# EAGLE board Telemetry Unit (EAGLE 9.3.0)
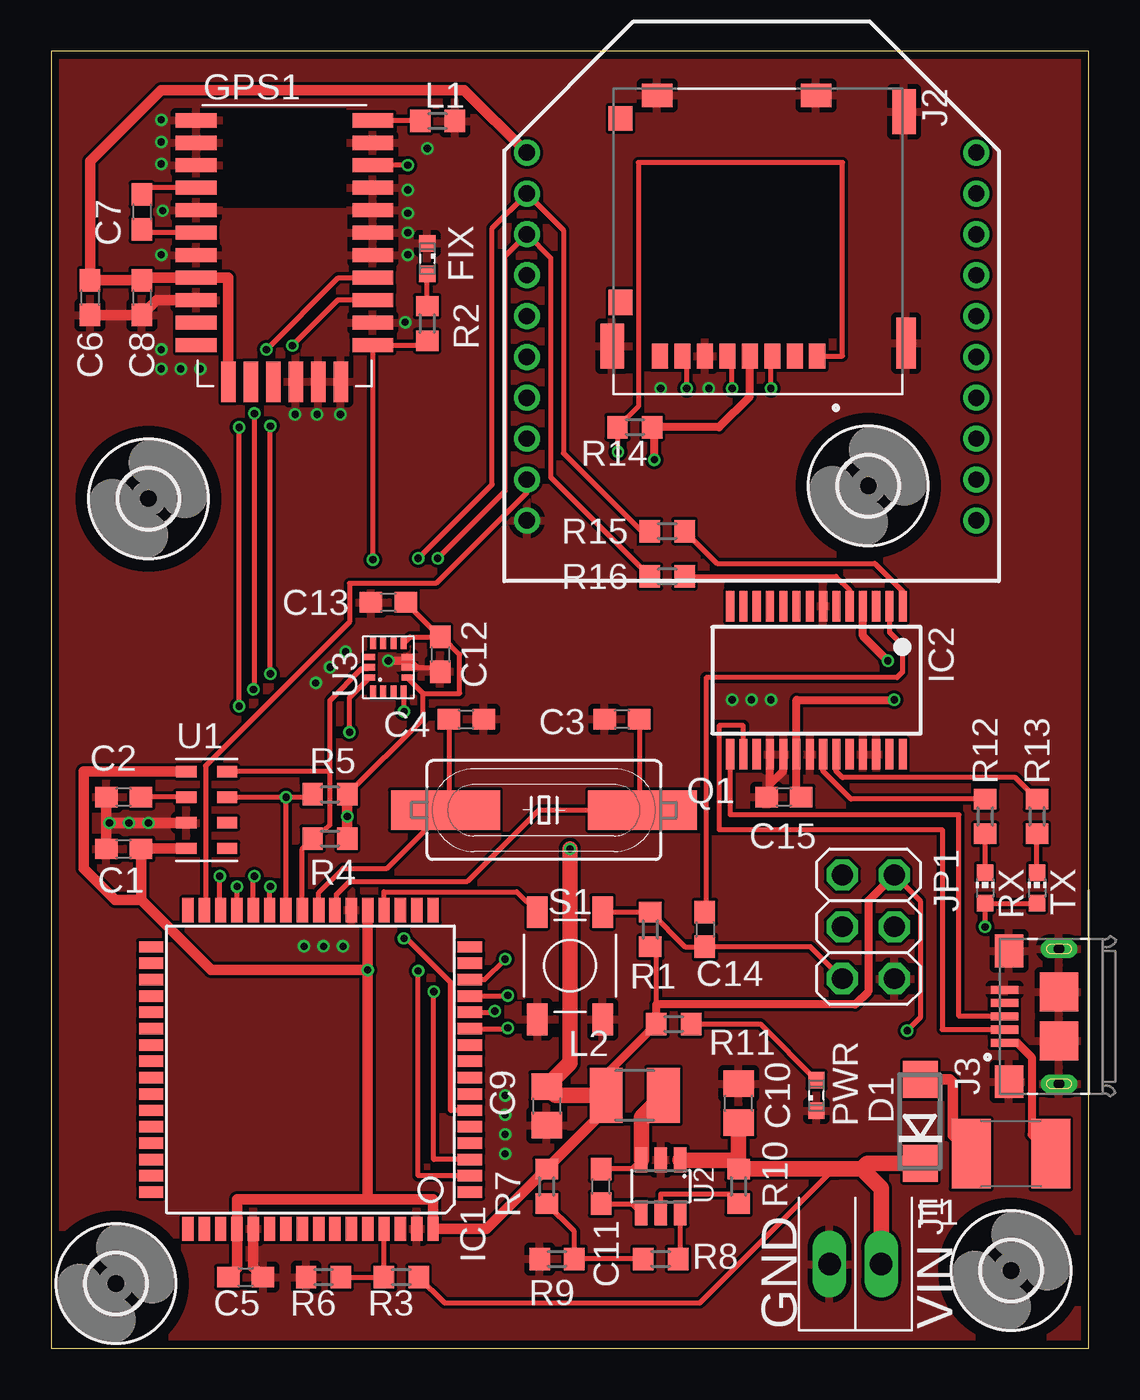
[diagram p0: board, top side]
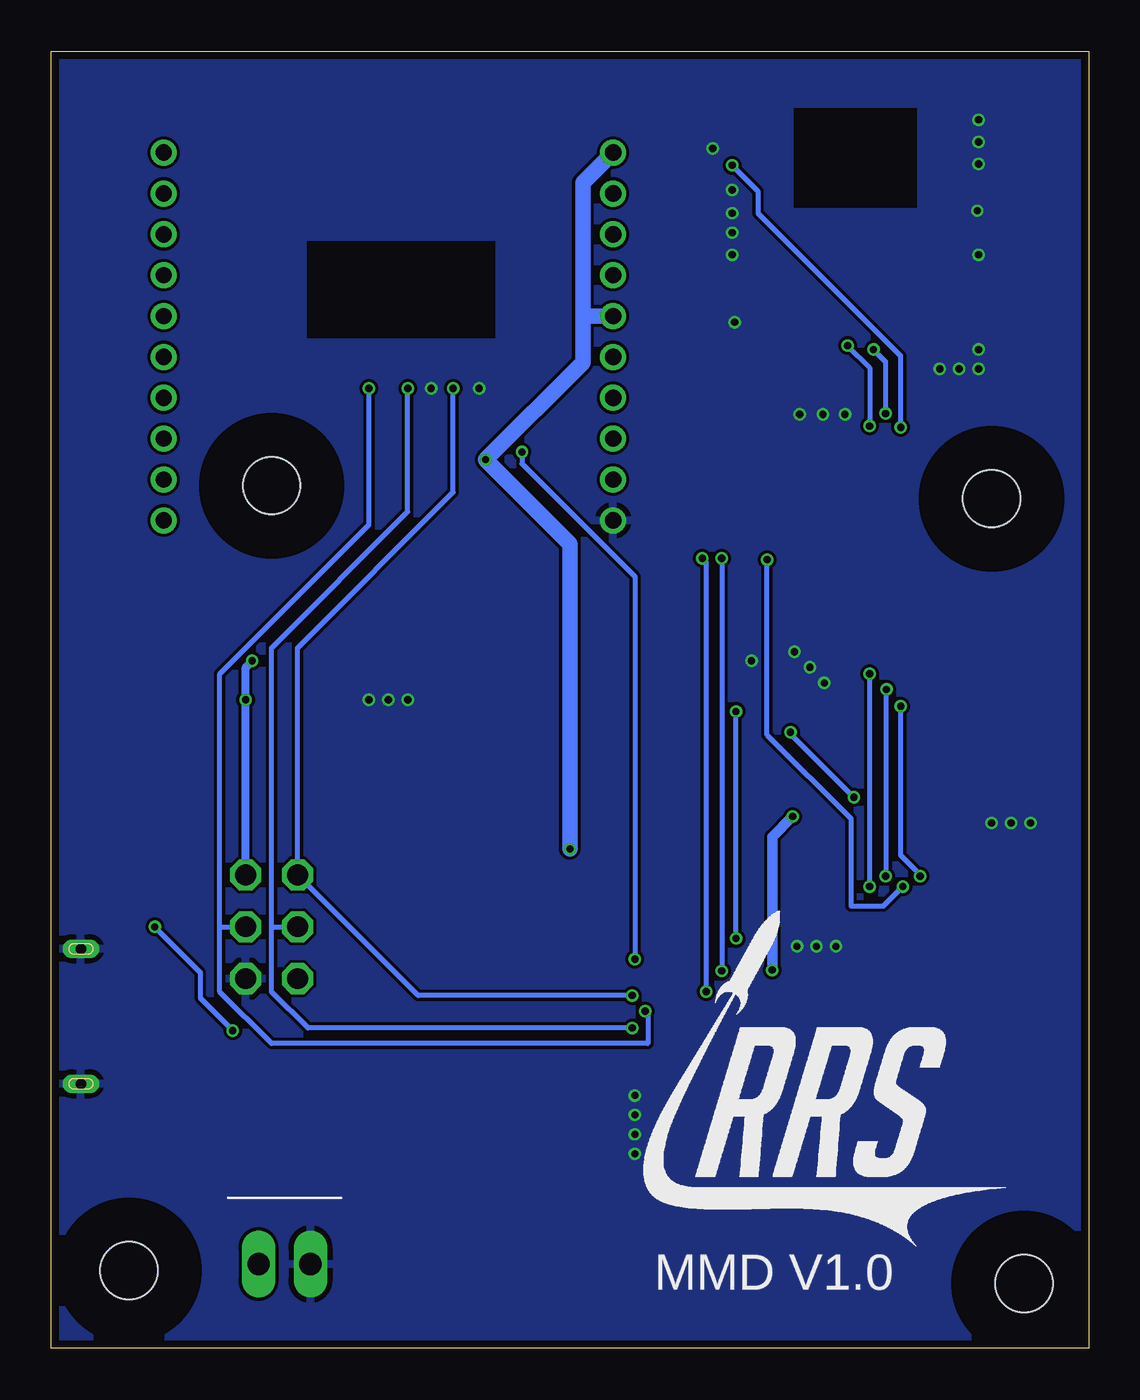
[diagram p1: board, bottom side, seen from below]

Size 50.8 x 63.5 mm. Coordinates in mm from the lower left corner, seen from the top.
Outline: 0,0 50.8,0 50.8,63.5 0,63.5 0,0
Copper layers (1*16): Top 0.035559375mm / dielectric 1.6mm / Bottom 0.035559375mm
Design rules "oshpark-2layer": minimum track width 6mil, minimum drill 10mil, track to track 6mil, track to pad 6mil, pad to pad 6mil, via to via 6mil, smd to smd 6mil, copper to edge 15mil, drill to drill 6mil, minimum pad ring 5mil, minimum via ring 5mil, stop-mask expansion 2.5mil, vias tented up to drill 0mil, thermal gap 10mil

## Footprints (pad centres in the part's own frame; a part is rotated, then mirrored left to right if it is on the bottom)
C0603 = smd 1.1 x 1: 1 -0.85,0; 2 0.85,0
C0805 = smd 1.3 x 1.5: 1 -0.95,0; 2 0.95,0
DO214AC = smd 1.8 x 1.7: A 2.05,0; C -2.05,0
FUSM1812X02 = smd 1.9 x 3.4: 1 -1.95,0; 2 1.95,0
SML0603 = smd 0.8 x 0.8: A 0.75,0; C -0.75,0
M20048-1 = smd 2 x 0.7: 1 -4.32,5.5; 2 -4.32,4.4; 3 -4.32,3.3; 4 -4.32,2.2; 5 -4.32,1.1; 6 -4.32,0; 7 -4.32,-1.1; 8 -4.32,-2.2; 9 -4.32,-3.3; 10 -4.32,-4.4; 11 -4.32,-5.5; 18 4.32,-5.5; 19 4.32,-4.4; 20 4.32,-3.3; 21 4.32,-2.2; 22 4.32,-1.1; 23 4.32,0; 24 4.32,1.1; 25 4.32,2.2; 26 4.32,3.3; 27 4.32,4.4; 28 4.32,5.5 | smd 0.7 x 2: 12 -2.75,-7.3; 13 -1.65,-7.3; 14 -0.55,-7.3; 15 0.55,-7.3; 16 1.65,-7.3; 17 2.75,-7.3
TQFP64 = smd 1.194 x 0.559: 1 -7.8,6; 2 -7.8,5.2; 3 -7.8,4.4; 4 -7.8,3.6; 5 -7.8,2.8; 6 -7.8,2; 7 -7.8,1.2; 8 -7.8,0.4; 9 -7.8,-0.4; 10 -7.8,-1.2; 11 -7.8,-2; 12 -7.8,-2.8; 13 -7.8,-3.6; 14 -7.8,-4.4; 15 -7.8,-5.2; 16 -7.8,-6; 33 7.8,-6; 34 7.8,-5.2; 35 7.8,-4.4; 36 7.8,-3.6; 37 7.8,-2.8; 38 7.8,-2; 39 7.8,-1.2; 40 7.8,-0.4; 41 7.8,0.4; 42 7.8,1.2; 43 7.8,2; 44 7.8,2.8; 45 7.8,3.6; 46 7.8,4.4; 47 7.8,5.2; 48 7.8,6 | smd 0.559 x 1.194: 17 -6,-7.8; 18 -5.2,-7.8; 19 -4.4,-7.8; 20 -3.6,-7.8; 21 -2.8,-7.8; 22 -2,-7.8; 23 -1.2,-7.8; 24 -0.4,-7.8; 25 0.4,-7.8; 26 1.2,-7.8; 27 2,-7.8; 28 2.8,-7.8; 29 3.6,-7.8; 30 4.4,-7.8; 31 5.2,-7.8; 32 6,-7.8; 49 6,7.8; 50 5.2,7.8; 51 4.4,7.8; 52 3.6,7.8; 53 2.8,7.8; 54 2,7.8; 55 1.2,7.8; 56 0.4,7.8; 57 -0.4,7.8; 58 -1.2,7.8; 59 -2,7.8; 60 -2.8,7.8; 61 -3.6,7.8; 62 -4.4,7.8; 63 -5.2,7.8; 64 -6,7.8
SSOP28 = smd 0.4 x 1.5: 1 -4.225,-3.625; 2 -3.575,-3.625; 3 -2.925,-3.625; 4 -2.275,-3.625; 5 -1.625,-3.625; 6 -0.975,-3.625; 7 -0.325,-3.625; 8 0.325,-3.625; 9 0.975,-3.625; 10 1.625,-3.625; 11 2.275,-3.625; 12 2.925,-3.625; 13 3.575,-3.625; 14 4.225,-3.625; 15 4.225,3.625; 16 3.575,3.625; 17 2.925,3.625; 18 2.275,3.625; 19 1.625,3.625; 20 0.975,3.625; 21 0.325,3.625; 22 -0.325,3.625; 23 -0.975,3.625; 24 -1.625,3.625; 25 -2.275,3.625; 26 -2.925,3.625; 27 -3.575,3.625; 28 -4.225,3.625
ST_2X1 = drill 1.1 long: 1 0,1.27; 2 0,-1.27
MOLEX_503182-1852 = smd 0.8 x 1.24: 1 -2.9,6.355; 2 -1.8,6.355; 3 -0.7,6.355; 4 0.4,6.355; 5 1.5,6.355; 6 2.6,6.355; 7 3.7,6.355; 8 4.8,6.355 | smd 1.16 x 1.2: DT 6.74,-5.275 | smd 0.95 x 2.5: P1 -7.245,5.725 | smd 1.15 x 2.2: P2 7.145,5.875; P3 -7.145,-5.605 | smd 1.5 x 1.15: P4 -2.84,-6.4; P5 4.94,-6.4 | smd 1.16 x 1.25: SW 6.74,3.725
FCI_10118193-0001LF = smd 0.4 x 1.35: 1 -1.3,2.675; 2 -0.65,2.675; 3 0,2.675; 4 0.65,2.675; 5 1.3,2.675 | smd 1.6 x 1.4: S1 -3.2,2.45; S2 3.2,2.45 | smd 1.9 x 1.9: S3 1.2,0; S4 -1.2,0 | drill 0.5 pad 0.9 long: S5 -3.3,0; S6 3.3,0
2X03 = drill 1.016 octagon: 1 -2.54,-1.27; 2 -2.54,1.27; 3 0,-1.27; 4 0,1.27; 5 2.54,-1.27; 6 2.54,1.27
L0603 = smd 1 x 1.1: 1 -0.85,0; 2 0.85,0
L1210 = smd 1.6 x 2.7: 1 -1.4,0; 2 1.4,0
HC49UP = smd 5.334 x 1.93: 1 -4.826,0; 2 4.826,0
R0603 = smd 1 x 1.1: 1 -0.85,0; 2 0.85,0
CHIP-LED0603 = smd 0.8 x 0.8: A 0,-0.75; C 0,0.75
TACT_SW_4.5MM = smd 1.55 x 1: P$1 -2.625,1.6; P$2 -2.625,-1.6; P$3 2.625,1.6; P$4 2.625,-1.6
LGA8 = smd 1 x 0.55: 1 -1,1.875; 2 -1,0.625; 3 -1,-0.625; 4 -1,-1.875; 5 1,-1.875; 6 1,-0.625; 7 1,0.625; 8 1,1.875
TSOT23-6 = smd 0.62 x 1.22: 1 -0.95,-1.3; 2 0,-1.3; 3 0.95,-1.3; 4 0.95,1.3; 5 0,1.3; 6 -0.95,1.3
14-LGA = smd 0.55 x 0.3: 1 -1.175,0.75; 2 -1.175,0.25; 3 -1.175,-0.25; 4 -1.175,-0.75; 8 1.175,-0.75; 9 1.175,-0.25; 10 1.175,0.25; 11 1.175,0.75 | smd 0.3 x 0.55: 5 -0.5,-0.925; 6 0,-0.925; 7 0.5,-0.925; 12 0.5,0.925; 13 0,0.925; 14 -0.5,0.925
2,8 = hole 2.8: 0,0
XBEE = drill 0.8 pad 1.27: 1 -11,9; 2 -11,7; 3 -11,5; 4 -11,3; 5 -11,1; 6 -11,-1; 7 -11,-3; 8 -11,-5; 9 -11,-7; 10 -11,-9; 11 11,-9; 12 11,-7; 13 11,-5; 14 11,-3; 15 11,-1; 16 11,1; 17 11,3; 18 11,5; 19 11,7; 20 11,9

## Placement (x,y rotation side)
C1  2.2u  [C0603]  3.56,24.45 180 top
C2  100n  [C0603]  3.56,26.99 180 top
C3  22p  [C0603]  27.94,30.8 180 top
C4  22p  [C0603]  20.32,30.8 0 top
C5  2.2u  [C0603]  9.53,3.49 0 top
C6  2.2u  [C0603]  1.91,51.44 270 top
C7  22p  [C0603]  4.45,55.63 270 top
C8  22p  [C0603]  4.45,51.44 270 top
C9  22u  [C0805]  24.26,11.87 270 top
C10  22u  [C0805]  33.66,12 90 top
C11  22p  [C0603]  26.92,7.94 90 top
C12  100n  [C0603]  19.05,33.97 270 top
C13  2.2u  [C0603]  16.51,36.51 180 top
C14  100n  [C0603]  32,20.51 270 top
C15  2.2u  [C0603]  35.88,26.99 180 top
D1  [DO214AC]  42.55,11.11 90 top
F1  MF-MSMF050-2  [FUSM1812X02]  46.99,9.53 180 top
FIX  [SML0603]  18.41,53.34 270 top
GPS1  M20048-1  [M20048-1]  11.43,54.61 0 top
IC1  MEGA128-A  [TQFP64]  12.7,13.65 180 top
IC2  FT232RL  [SSOP28]  37.47,32.7 180 top
J1  [ST_2X1]  39.37,4.13 270 top
J2  503182-1852  [MOLEX_503182-1852]  34.61,54.93 180 top
J3  10118193-0001LF  [FCI_10118193-0001LF]  49.34,16.26 90 top
JP1  [2X03]  40.01,20.64 270 top
L1  1.8n  [L0603]  18.92,60.07 0 top
L2  6.8u  [L1210]  28.57,12.38 180 top
PWR  [SML0603]  37.47,12.38 90 top
Q1  10MHz  [HC49UP]  24.13,26.35 0 top
R1  10k  [R0603]  29.34,20.51 90 top
R2  470  [R0603]  18.41,50.16 90 top
R3  30k  [R0603]  17.14,3.49 180 top
R4  1.8k  [R0603]  13.65,27.11 180 top
R5  1.8k  [R0603]  13.65,24.96 180 top
R6  10k  [R0603]  13.34,3.49 180 top
R7  40.2k  [R0603]  24.26,7.94 270 top
R8  59k  [R0603]  29.84,4.38 180 top
R9  13k  [R0603]  24.77,4.38 180 top
R10  100k  [R0603]  33.66,7.94 270 top
R11  470  [R0603]  30.48,15.88 0 top
R12  1k  [R0603]  45.72,26.04 90 top
R13  1k  [R0603]  48.26,26.04 90 top
R14  10k  [R0603]  28.57,45.09 180 top
R15  10k  [R0603]  30.16,40.01 180 top
R16  10k  [R0603]  30.16,37.78 180 top
RX  [CHIP-LED0603]  45.72,22.54 0 top
S1  TACT_SW_4.5MM  [TACT_SW_4.5MM]  25.4,18.73 90 top
TX  [CHIP-LED0603]  48.26,22.54 0 top
U1  MPL3115A2  [LGA8]  7.62,26.35 0 top
U2  AP65111A  [TSOT23-6]  29.84,7.94 180 top
U3  LSM6DS3  [14-LGA]  16.51,33.34 90 top
U$1  [2,8]  4.76,41.59 0 top
U$2  [2,8]  46.99,3.81 0 top
U$3  [2,8]  40.01,42.23 0 top
U$4  [2,8]  3.17,3.17 0 top
XB1  XBEE  [XBEE]  34.29,49.53 0 top

## Library data of the parts
C1-C15 R1-R11 R14-R16 = resistor
D1 = diode
F1 = MF-MSMF050-2; AVAILABILITY: Unavailable; DESCRIPTION: PTC Resettable Fuse 0.5A_hold_ 1A_trip_ 15V 100A 0.8W 0.15s 0.15Ohm SMD Solder Pad 1812 T/R; MF: Bourns; MP: MF-MSMF050-2; PACKAGE: 1812 Bourns; PRICE: None
FIX PWR RX TX = led
GPS1 J1 L1 L2 S1 U1-U3 = TrackerPeripherals
IC1 = atmel; MPN: ATMEGA128-16AU; OC_FARNELL: 9171118; OC_NEWARK: 95K7364
IC2 = ftdichip; MPN: FT232RL; OC_FARNELL: 1146032; OC_NEWARK: 91K9918
J2 = 503182-1852_SD; DESCRIPTION: MICRO SD NORMAL ULTRALOWPRO8CKTE; DIGI-KEY_PART_NUMBER: WM12834CT-ND; DIGI-KEY_PURCHASE_URL: https://www.digikey.com/product-detail/en/molex/5031821852/WM12834CT-ND/5823232?utm_source=snapeda&utm_medium=aggregator&utm_campaign=symbol; MF: Molex, LLC; MP: 5031821852; PACKAGE: None
J3 = 10118193-0001LF_microUSB; DESCRIPTION: Conn Micro USB Type B RCP 5 POS 0.65mm Solder RA SMD 5 Terminal 1 Port T/R; DIGI-KEY_PART_NUMBER: 609-4616-1-ND; DIGI-KEY_PURCHASE_URL: https://www.digikey.com/product-detail/en/amphenol-icc-fci/10118193-0001LF/609-4616-1-ND/2785380?utm_source=snapeda&utm_medium=aggregator&utm_campaign=symbol; MF: Amphenol ICC; MP: 10118193-0001LF; PACKAGE: None
JP1 = pinhead
Q1 = crystal; OC_FARNELL: unknown; OC_NEWARK: unknown
R12 R13 = rcl; SPICEPREFIX: R
U$1-U$4 = holes
XB1 = TrackerPeripherals; MPN: XBP24-Z7UIT-004; OC_FARNELL: 1751799; OC_NEWARK: 34R5507

## Nets
!GPS_SLP: GPS1.26 IC1.30
!RST: IC1.20 S1.P$3
+3V3: C1.1 C5.1 C6.1 C8.1 C9.1 C12.1 C13.1 C15.1 GPS1.8 GPS1.12 IC1.21 IC1.52 IC1.64 IC2.4 IC2.20 J2.4 JP1.2 L2.2 R1.1 R4.1 R5.1 R7.1 R11.1 R14.1 RX.A TX.A U1.1 U1.4 U3.5 U3.8 XB1.1 XB1.5
ACCEL_INT: IC1.6 U3.4
CS_SD: IC1.14 J2.1 R14.2
FIX: GPS1.18 IC1.29 R2.1
GND: C1.2 C2.2 C3.2 C4.2 C5.2 C6.2 C8.2 C9.2 C10.2 C12.2 C13.2 C15.2 FIX.C GPS1.1 GPS1.2 GPS1.3 GPS1.5 GPS1.7 GPS1.9 GPS1.15 GPS1.16 GPS1.17 GPS1.19 GPS1.22 GPS1.23 GPS1.24 GPS1.25 GPS1.27 IC1.22 IC1.53 IC1.63 IC2.7 IC2.18 IC2.19 IC2.21 IC2.25 IC2.26 J1.2 J2.6 J2.P1 J2.P2 J2.P3 J2.P4 J2.P5 J3.5 J3.S1 J3.S2 J3.S3 J3.S4 J3.S5 J3.S6 JP1.6 L1.2 PWR.C R6.2 R9.2 S1.P$1 S1.P$2 U1.3 U2.2 U3.6 U3.7 XB1.10
MISO: IC1.13 J2.7 JP1.1
MOSI: IC1.12 J2.3 JP1.4
N$1: C7.1 GPS1.4
N$2: C2.1 U1.2
N$3: C7.2 GPS1.6
N$4: GPS1.28 L1.1
N$5: IC1.61 R3.2 R6.1
N$6: FIX.A R2.2
N$7: C11.2 L2.1 U2.3
N$8: R7.2 R8.2 R9.1
N$9: R10.2 U2.5
N$10: R8.1 U2.6
N$11: IC2.16 J3.2
N$12: C11.1 U2.4
N$13: IC2.15 J3.3
N$14: PWR.A R11.2
N$15: R12.1 RX.C
N$16: C14.1 IC2.2
N$17: R13.1 TX.C
N$18: IC2.22 R12.2
N$19: IC2.23 R13.2
N$20: IC2.1 R15.1
N$21: IC2.5 R16.1
N$22: F1.1 J3.1
RF_SLP: IC1.31 XB1.9
RST2: C14.2 JP1.5 R1.2 S1.P$4
RX0: IC1.2 R15.2 XB1.2
RX1: GPS1.20 IC1.27
SCK: IC1.11 J2.5 JP1.3
SCL: IC1.25 R5.2 U1.8 U3.13
SDA: IC1.26 R4.2 U1.7 U3.14
TX0: IC1.3 R16.2 XB1.3
TX1: GPS1.21 IC1.28
V_USB: D1.A F1.2
VBAT: C10.1 D1.C J1.1 R3.1 R10.1 U2.1
XTAL1: C4.1 IC1.24 Q1.1
XTAL2: C3.1 IC1.23 Q1.2

## Tracks (layer width: path | path; a pad name or v marks a point on that pad's centre or on a via)
!GPS_SLP  (via drill 0.35)
  Top 0.254: IC1.30 8.26,21.45 v8.26,23.11 | v9.21,31.43 v9.21,45.09 | v17.46,57.91 GPS1.26
  Bottom 0.254: v8.26,23.11 8.26,23.18 9.21,24.13 v9.21,31.43 | v9.21,45.09 9.21,48.58 16.19,55.56 16.19,56.64 v17.46,57.91
!RST
  Top 0.254: IC1.20 16.3,22.35 22.8,22.35 S1.P$3
+3V3  (via drill 0.35)
  Top 0.254: 27.18,11.71 L2.2 27.18,13.42 | U3.8 17.57,34.82 C12.1 | C13.1 C12.1 | 4.44,24.48 C1.1 | U3.5 18.2,32.07 | 18.2,32.07 20,32.07 20,33.97 19.15,34.82 C12.1 | R4.1 18.2,30.82 18.2,32.07 | 29.63,16.83 29.63,19.37 R1.1 | JP1.2 42.55,21.91 42.55,16.19 v41.91,15.56 | v45.72,20.64 RX.A TX.A
  Top 0.381: 27.18,13.42 R11.1 29.63,16.83 39.37,16.83 40.01,17.46 40.01,21.91 JP1.2 | J2.4 34.21,46.59 32.7,45.09 R14.1 29.53,44.98 v29.53,43.5 | v40.96,33.66 39.74,34.87 IC2.4 | v41.27,31.75 36.49,31.75 IC2.20 36.49,27.23 C15.1
  Top 0.508: 27.18,11.71 R7.1 21.32,5.85 IC1.64 18.7,7.3 15.5,7.3 | U1.4 4.44,24.48 | 15.5,7.3 9.1,7.3 IC1.52 9.1,3.92 C5.1 | 15.5,7.3 v15.5,18.52 | 4.41,21.95 C1.1 | 4.41,21.95 7.83,18.52 v15.5,18.52 | 4.41,21.95 3.14,21.95 1.59,23.5 1.59,28.23 U1.1 | v15.5,18.52 IC1.21 | R4.1 v14.5,26.04 R5.1 | XB1.1 20.23,61.59 5.4,61.59 1.91,58.1 C6.1 C8.1 4.57,52.41 GPS1.8 8.68,52.41 GPS1.12
  Top 0.762: L2.2 24.7,12.38 C9.1 25.4,13.97 v25.4,24.45
  Bottom 0.254: v45.72,20.64 43.5,18.41 43.5,17.14 v41.91,15.56
  Bottom 0.381: v40.96,33.66 41.27,33.34 v41.27,31.75 JP1.2
  Bottom 0.508: v14.5,26.04 15.5,25.04 v15.5,18.52
  Bottom 0.762: v25.4,24.45 25.4,39.37 v29.53,43.5 24.77,48.26 24.77,50.48 | 24.77,50.48 24.77,57.05 XB1.1 | XB1.5 24.72,50.53 24.77,50.48
ACCEL_INT  (via drill 0.35)
  Top 0.254: IC1.6 19.56,11.65 19.56,17.91 17.4,20.07 v17.27,20.07 | v17.27,31.18 17.27,32.15 U3.4
  Bottom 0.254: v17.27,20.07 v17.27,31.18
CS_SD  (via drill 0.35)
  Top 0.254: IC1.14 21.23,18.05 v22.23,19.05 | J2.1 38.73,48.58 38.73,58.04 28.74,58.04 28.74,46.1 R14.2 27.75,45.06 v27.75,43.88
  Bottom 0.254: v22.23,19.05 22.23,37.78 27.75,43.31 v27.75,43.88
FIX  (via drill 0.35)
  Top 0.254: IC1.29 9.1,22.67 v9.1,22.61 | v15.75,38.61 GPS1.18 18.21,49.11 R2.1
  Bottom 0.254: v9.1,22.61 10.06,21.65 11.64,21.65 11.64,25.93 15.75,30.04 v15.75,38.61
GND  (via drill 0.35)
  Top 0.254: C12.2 18.84,33.34 17.93,33.34 | 17.93,33.34 U3.6 | U3.7 17.93,33.34
  Top 0.381: C15.2 35.19,27.15 35.19,27.62 | 35.19,27.62 IC2.18 | 35.19,27.62 35.84,28.27 IC2.19 | 5.4,60.11 v5.4,60.13 | 5.4,59.01 v5.4,59.05 | 5.4,57.91 v5.4,57.98 | 5.4,53.51 v5.4,53.53 | 5.46,55.71 v5.46,55.69 | 17.34,50.21 v17.34,50.23 | 17.46,53.51 v17.46,53.53 | 15.75,55.56 GPS1.24 | 15.75,56.71 GPS1.25 | 11.98,45.76 v11.94,45.72 | 14.18,45.74 v14.16,45.72 | U3.7 17.43,33.66 v16.51,33.66
  Top 0.508: C6.2 C8.2 5.17,51.31 GPS1.9 | U1.3 2.71,25.73 | 2.71,25.73 C2.2 | C1.2 2.71,25.73 | C5.2 9.9,3.97 IC1.53
  other vias: 17.46,54.61 17.46,55.56 18.41,58.74 17.46,56.71 13.02,45.72 22.23,12.38 22.23,11.43 22.23,10.48 22.23,9.53 2.86,25.72 3.81,25.72 4.76,25.72 12.38,19.68 13.34,19.68 14.29,19.68 14.41,34.1 13.65,33.34 12.95,32.58 33.34,31.75 34.29,31.75 35.24,31.75 5.4,48.9 5.4,47.94 6.35,47.94 7.3,47.94 29.84,46.99 32.19,46.99
  pour Bottom: 0,63.5 0,0 50.8,0 50.8,63.5
  pour Top: 0,63.5 0,0 50.8,0 50.8,63.5
MISO  (via drill 0.35)
  Top 0.254: IC1.13 22.33,17.25 v22.35,17.27 | v31.11,46.99 31.11,48.37 J2.7
  Bottom 0.254: v22.35,17.27 32.83,17.27 JP1.1 38.73,34.29 31.11,41.91 v31.11,46.99
MOSI  (via drill 0.35)
  Top 0.254: IC1.12 21.66,16.45 v21.72,16.51 | v35.24,46.99 35.24,48.51 J2.3
  Bottom 0.254: v21.72,16.51 21.59,16.38 21.59,14.92 40.01,14.92 42.55,17.46 42.55,20.64 | 42.55,20.64 JP1.4 | 42.55,20.64 42.55,33.02 35.24,40.32 v35.24,46.99
N$1
  Top 0.254: GPS1.4 4.45,56.81 C7.1
N$2
  Top 0.254: U1.2 C2.1
N$3
  Top 0.254: GPS1.6 4.45,54.61 C7.2
N$4
  Top 0.254: GPS1.28 18.07,60.11 L1.1
N$5
  Top 0.254: R6.1 R3.2 IC1.61
N$6
  Top 0.254: R2.2 FIX.A
N$7
  Top 0.254: U2.3 28.45,8.79 C11.2
  Top 0.762: U2.3 28.89,11.3 L2.1
N$8
  Top 0.254: R8.2 R9.1 25.61,5.73 R7.2
N$9
  Top 0.254: U2.5 29.84,7.56 33.19,7.56 R10.2
N$10
  Top 0.254: U2.6 30.8,4.48 R8.1
N$11
  Top 0.254: IC2.16 33.89,30.48 32.7,30.48 32.7,25.4 43.62,25.4 43.62,15.61 J3.2
N$12
  Top 0.254: C11.1 28.45,7.09 U2.4
N$13
  Top 0.254: IC2.15 33.24,26.13 44.44,26.13 44.44,16.26 J3.3
N$14
  Top 0.254: R11.2 34.72,15.88 PWR.A
N$15
  Top 0.254: RX.C R12.1
N$16
  Top 0.254: IC2.2 41.04,35.06 41.67,34.42 41.67,33.1 41.41,32.84 32.07,32.84 32.07,21.42 C14.1
N$17
  Top 0.254: TX.C R13.1
N$18
  Top 0.254: R12.2 39.16,26.89 37.78,28.26 37.79,28.27 IC2.22
N$19
  Top 0.254: R13.2 47.2,27.94 38.73,27.94 38.42,28.26 38.42,29.05 IC2.23
N$20
  Top 0.254: R15.1 32.6,38.42 40.32,38.42 41.69,37.05 IC2.1
N$21
  Top 0.254: R16.1 38.42,37.78 39.09,37.11 IC2.5
N$22
  Top 0.381: F1.1 48.01,10.46 48.01,14.25 47.3,14.96 J3.1
RF_SLP
  Top 0.254: XB1.9 23.29,41.9 18.84,37.45 14.61,37.45 14.61,35.56 7.56,28.52 7.56,21.52 IC1.31
RST2
  Top 0.254: S1.P$4 27.96,21.36 R1.2 31.04,19.66 C14.2 37.17,19.66 JP1.5
RX0  (via drill 0.35)
  Top 0.254: IC1.2 17.97,8.45 v17.97,18.48 | v17.97,38.67 21.59,42.29 21.59,54.83 XB1.2 25.08,54.74 25.08,43.81 28.89,40.01 R15.2
  Bottom 0.254: v17.97,38.67 v17.97,18.48
RX1  (via drill 0.35)
  Top 0.254: IC1.27 10.7,22.61 v10.73,22.61 | v10.73,33.02 v10.73,45.15 | GPS1.20 14.04,51.31 v11.81,49.09
  Bottom 0.254: v10.73,22.61 v10.73,33.02 | v11.81,49.09 10.73,48.01 v10.73,45.15
SCK  (via drill 0.35)
  Top 0.254: IC1.11 22.32,15.65 v22.35,15.68 | v33.34,46.99 33.34,48.34 J2.5
  Bottom 0.254: v22.35,15.68 38.23,15.68 40.01,17.46 40.01,20.64 | 40.01,20.64 JP1.3 | 40.01,20.64 40.01,34.29 33.34,40.96 v33.34,46.99
SCL
  Top 0.254: 13.65,28.23 U1.8 | 13.65,28.23 13.65,25.61 R5.2 12.3,24.45 IC1.25 | U3.13 15.51,33.27 15.19,33.27 13.65,31.73 13.65,28.23
SDA  (via drill 0.35)
  Top 0.254: IC1.26 v11.5,26.98 | v11.5,26.98 U1.7 | R4.2 12.92,26.98 v11.5,26.98 | v14.61,30.16 14.61,31.86 U3.14
  Bottom 0.254: v11.5,26.98 14.61,30.08 v14.61,30.16
TX0  (via drill 0.35)
  Top 0.254: IC1.3 18.73,9.25 v18.73,17.46 | v18.92,38.67 22.23,41.97 22.23,53.47 XB1.3 24.45,53.37 24.45,42.65 R16.2
  Bottom 0.254: v18.92,38.67 18.73,38.48 v18.73,17.46
TX1  (via drill 0.35)
  Top 0.254: IC1.28 9.9,23.11 v9.95,23.11 | v10.54,48.9 14.06,52.41 GPS1.21 | v9.95,45.76 9.95,32.3 v9.91,32.26
  Bottom 0.254: v9.95,23.11 9.91,23.16 v9.91,32.26 | v10.54,48.9 9.95,48.3 v9.95,45.76
V_USB
  Top 0.508: F1.2 44.13,10.43 44.13,13.02 43.99,13.16 D1.A
VBAT
  Top 0.254: R3.1 19.27,2.22 31.75,2.22 38.31,8.79 38.42,8.79
  Top 0.762: 39.69,8.79 38.42,8.79 R10.1 33.66,9.21 | C10.1 33.66,9.21 | U2.1 30.82,9.21 33.66,9.21 | D1.C 39.96,9.06 39.69,8.79 | J1.1 40.64,7.83 39.69,8.79
XTAL1
  Top 0.254: C4.1 19.47,26.52 Q1.1 16.45,23.5 14.29,23.5 13.1,22.31 IC1.24
XTAL2
  Top 0.254: C3.1 28.79,26.52 Q1.2 23.88,26.35 20.38,22.86 14.61,22.86 13.97,22.23 13.97,21.52 IC1.23

## Text on the board
tPlace: GND | VIN
bPlace: MMD V1.0